# Altium PCB UL-SWAP-DAQ-3-MODULE.PcbDoc
Units mil, origin at the board's own origin, x right, y up, seen from the top; angles counter-clockwise.
Board outline 850 x 1690 mil, 2 copper layers (Top Layer, Bottom Layer); 49 components, 36 nets, 159 pads, 48 vias.
Unrouted connection lines stored in the file: 10.
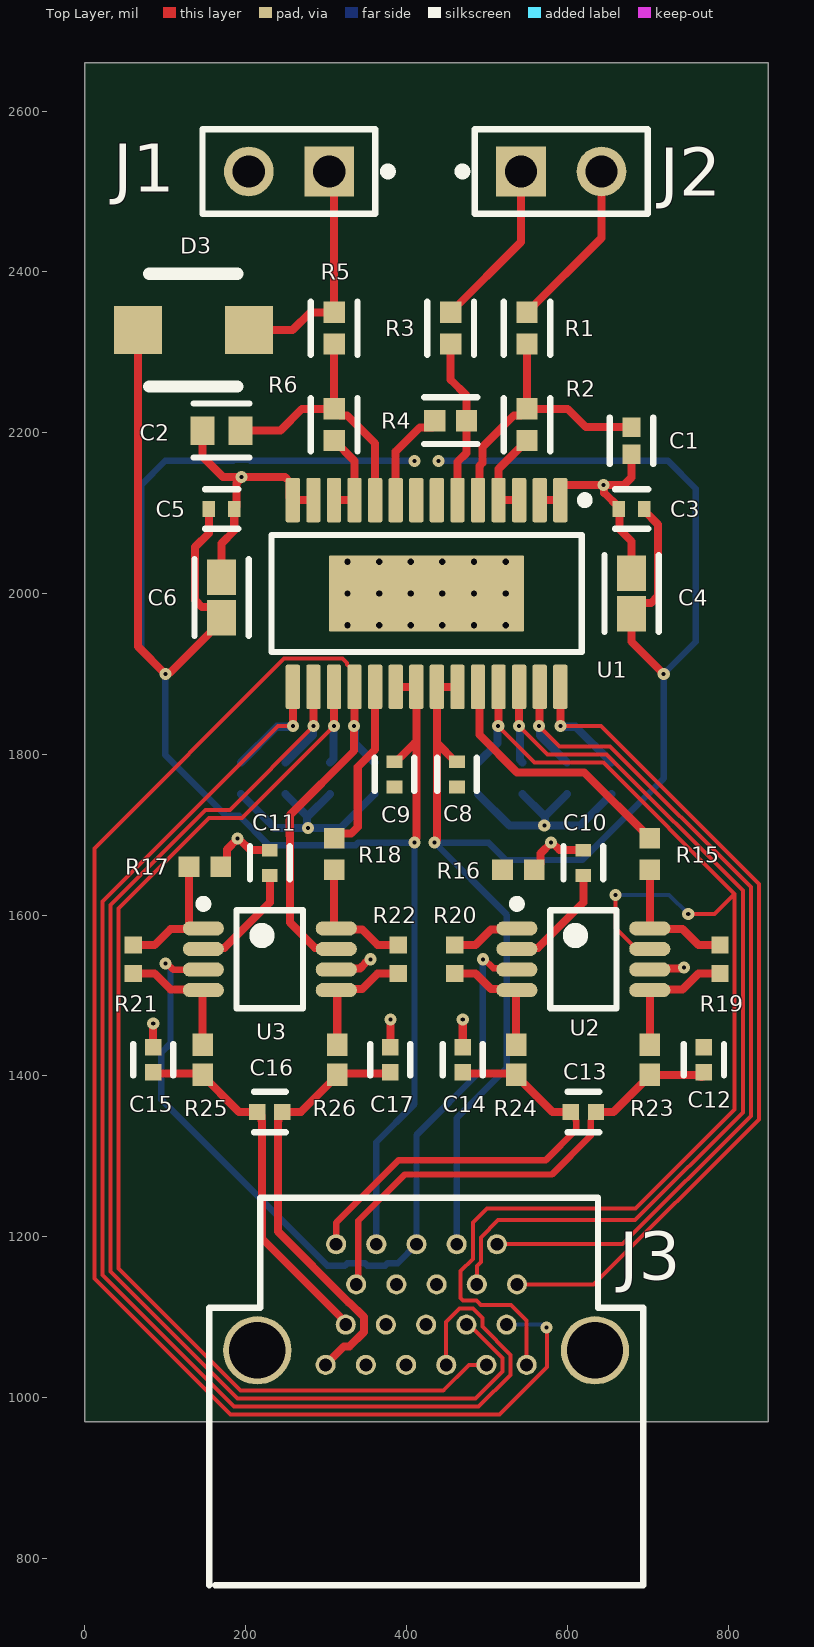
[diagram p0: Top Layer view]
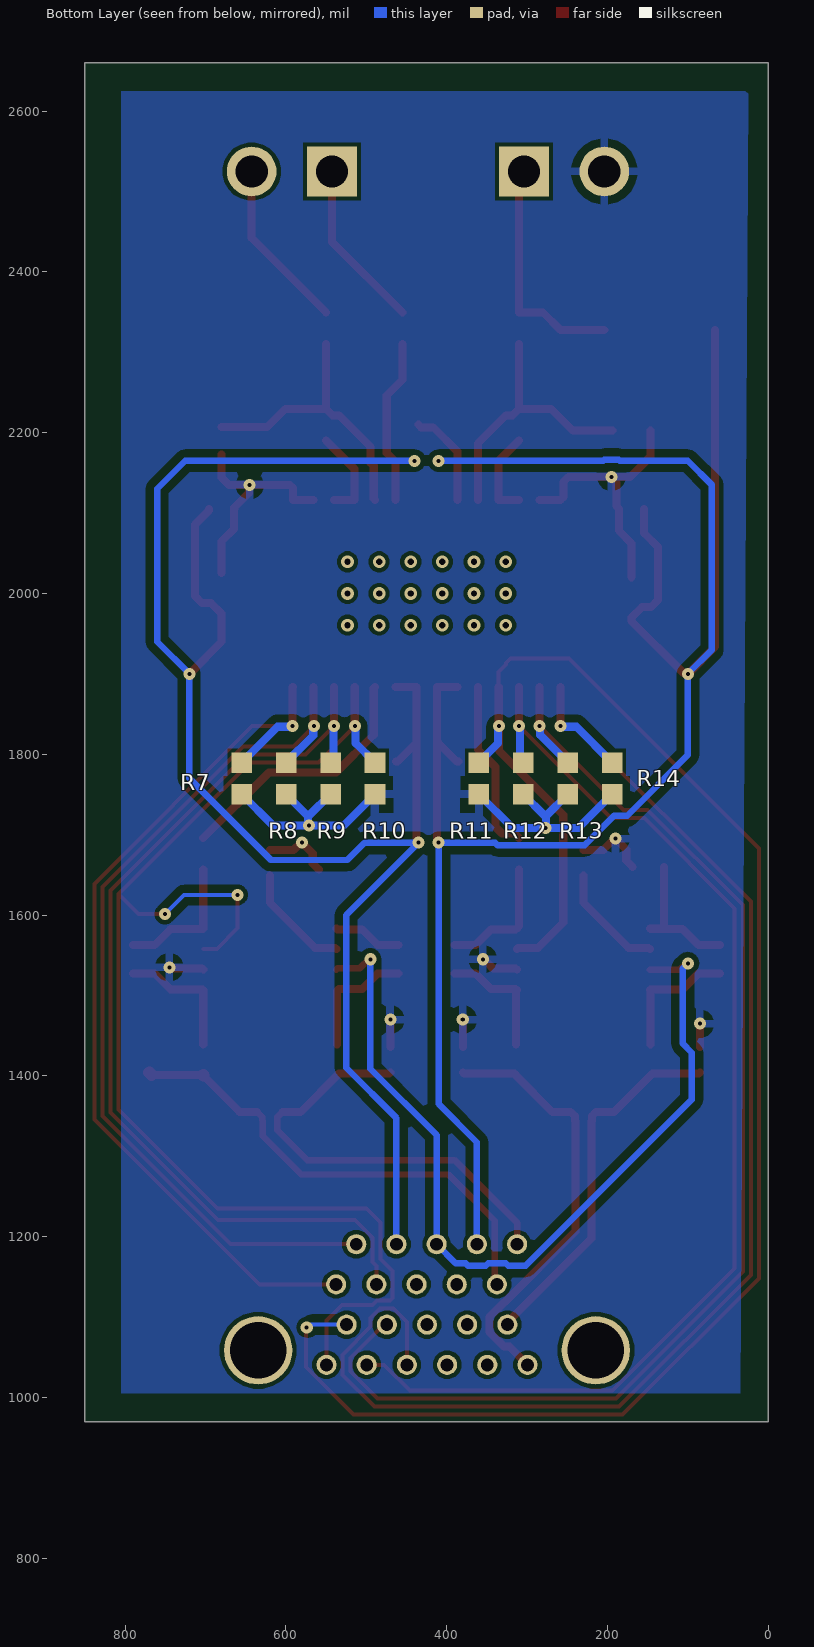
[diagram p1: Bottom Layer view, seen from below]
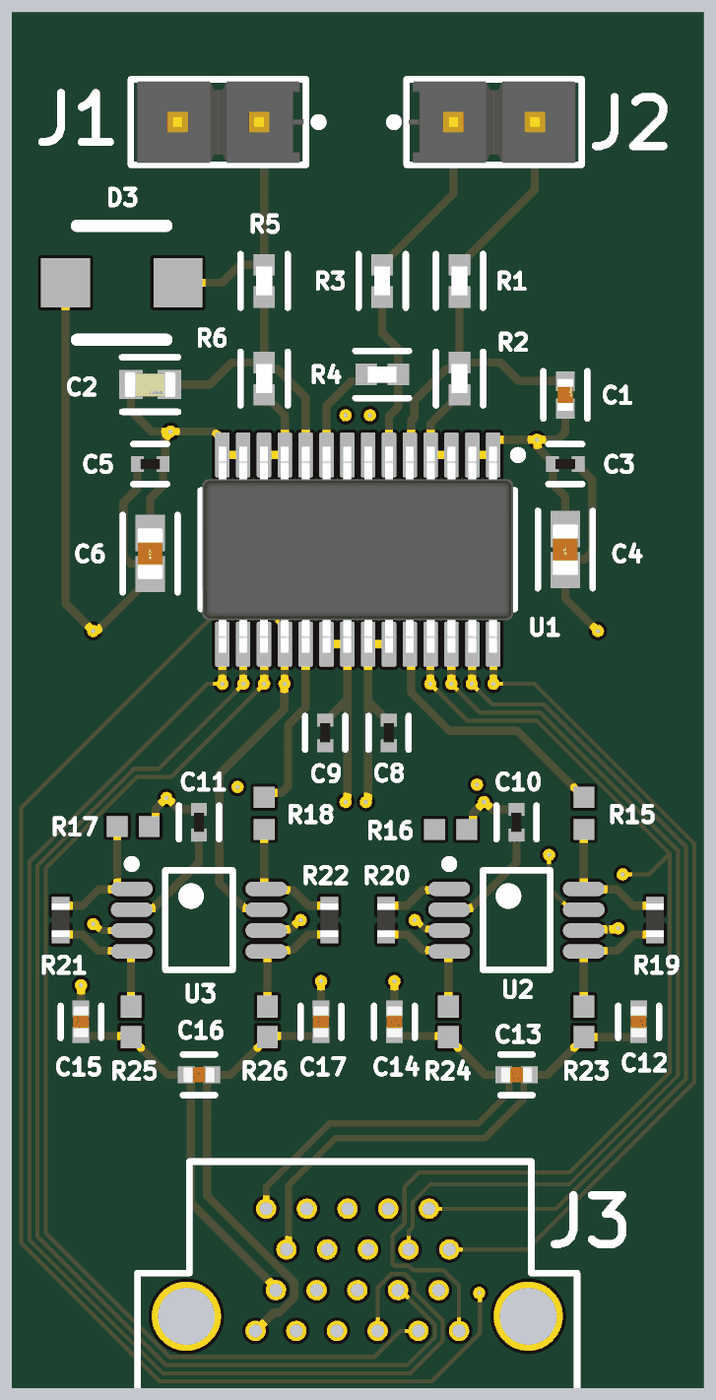
[diagram p2: 3D render of the assembled board from above, using the file's embedded part models]
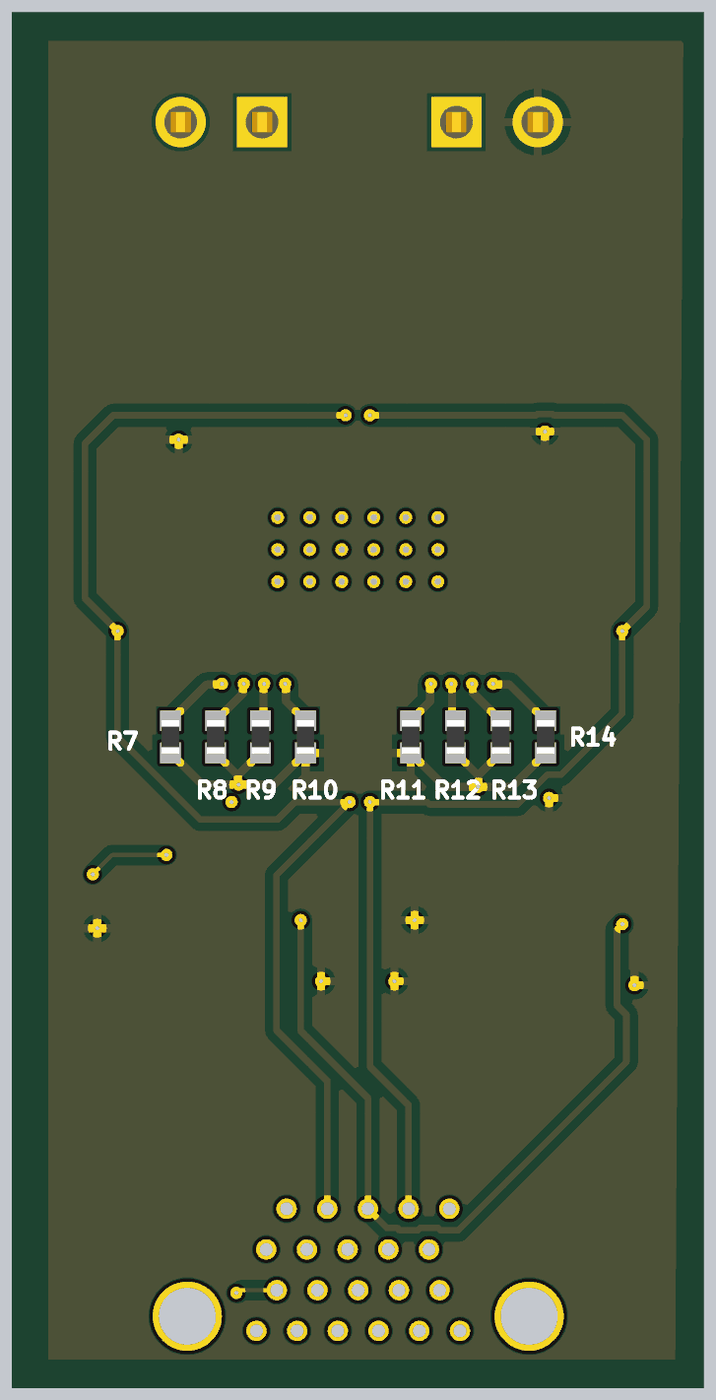
[diagram p3: 3D render of the assembled board from below, using the file's embedded part models]

## Layer stack, top to bottom
Top Solder: solder mask 0.4, Solder Resist, Dk 3.5
Top Layer: signal copper 1.4
Dielectric 1: dielectric 12.6, FR-4, Dk 4.8
Bottom Layer: signal copper 1.4
Bottom Solder: solder mask 0.4, Solder Resist, Dk 3.5

## Board outline
0,970 850,970 850,2660 0,2660

## Design rules (kind name [scope] priority, off if disabled: settings)
Clearance [All] p1: gap=5 ignorepadtopadclearanceinfootprint=FALSE except(0: Arc-Hole Track-Hole SMDPad-Hole THPad-Hole Via-Hole Fill-Hole Poly-Hole Region-Hole Text-Hole; 10: Arc-Fill Arc-Poly Arc-Region Arc-Text Track-Fill Track-Poly Track-Region Track-Text Fill-Fill Fill-Poly Fill-Region Fill-Text Poly-Poly Poly-Region Poly-Text Region-Region Region-Text Text-Text)
DiffPairsRouting [All] p1: maxlimit=10 minlimit=5 mostfreqgap=10 toplayer_minwidth=5 toplayer_maxwidth=15 toplayer_prefwidth=15 bottomlayer_minwidth=5 bottomlayer_maxwidth=15 bottomlayer_prefwidth=15 maxuncoupledlength=500
PolygonConnect [All] p1: connectstyle=Relief reliefconductorwidth=10 reliefentries=4 polygonreliefangle="90 Angle" airgapwidth=10
RoutingVias [All] p1: holewidth=28 width=50 viastyle="Through Hole" minholewidth=28 minwidth=50 maxholewidth=28 maxwidth=50
SolderMaskExpansion [All] p1: expansion=4 istentingtop=FALSE
Width [All] p1: maxlimit=10 minlimit=5 preferedwidth=10 minimp=50.000000 maximp=50.000000 favimp=50.000000
29 further rules are at their usual default settings.

## Classes and differential pairs
component class CONNECTED-MODULE: J3
component class U_THS7002CPWP_Schematic: C1 C2 C3 C4 C5 C6 C8 C9 D3 R1 R2 R3 R4 R5 R6 R7 R8 R9 R10 R11 R12 R13 R14 U1
component class U_LTC6362_Schematic: C10 C11 C12 C13 C14 C15 C16 C17 R15 R16 R17 R18 R19 R20 R21 R22 R24 R25 R26 U2 U3
differential pair ADC_CH2_CH3: +ADC_CH2_CH3_P -ADC_CH2_CH3_N
differential pair ADC_CH0_CH1: +ADC_CH0_CH1_P -ADC_CH0_CH1_N

## Components (designator, comment, footprint, x,y, rotation, side; value= is the part's Value field where it differs from the comment)
C1 "GRM1557U1A302JA01D" FP-GRM155-0_05-IPC_B 680,2190 r90 top
C2 "C0603C622J5GACTU" FP-C0603C-CF-MFG 170,2202.67 r180 top value="6,200 pF"
C3 "GRM155R71C104KA88D" FP-GRM15-MFG 680,2105 r180 top value=0.10μF
C4 "C1608X5R1A685K080AC" FP-C1608-080-0_1-IPC_B 680,2000 r90 top
C5 "GRM155R71C104KA88D" FP-GRM15-MFG 170,2105 r0 top value=0.10μF
C6 "C1608X5R1A685K080AC" FP-C1608-080-0_1-IPC_B 170,1995 r90 top
C8 "GRM155R71C104KA88D" FP-GRM15-MFG 462.98,1775 r270 top value=0.10μF
C9 "GRM155R71C104KA88D" FP-GRM15-MFG 385,1775 r270 top value=0.10μF
C10 "GRM155R71C104KA88D" FP-GRM15-MFG 620,1665 r90 top value=0.10μF
C11 "GRM155R71C104KA88D" FP-GRM15-MFG 230,1665 r90 top value=0.10μF
C12 "C0402C392K3RACTU" FP-C0402-BB-MFG 770,1420 r90 top value="3,900 pF"
C13 "C0402C392K3RACTU" FP-C0402-BB-MFG 620,1355 r0 top value="3,900 pF"
C14 "C0402C392K3RACTU" FP-C0402-BB-MFG 470,1420 r90 top value="3,900 pF"
C15 "C0402C392K3RACTU" FP-C0402-BB-MFG 84.94,1420 r90 top value="3,900 pF"
C16 "C0402C392K3RACTU" FP-C0402-BB-MFG 230,1355 r180 top value="3,900 pF"
C17 "C0402C392K3RACTU" FP-C0402-BB-MFG 379.76,1420 r90 top value="3,900 pF"
D3 "CMJ0130" CMJ2000_Footprint 135,2327.7 r270 top
J1 "Comment" FP-TSW-102-07-L-S-MFG 253.86,2525 r180 top
J2 "Comment" FP-TSW-102-07-L-S-MFG 592.56,2525 r0 top
J3 "Comment" A29400-021 214.46,1058.52 r0 top
R1 "CRCW0402499RFKED" FP-CRCW0402-e3-IPC_A 550,2330 r270 top
R2 "CRCW0402499RFKED" FP-CRCW0402-e3-IPC_A 550,2210 r270 top
R3 "CRCW0402499RFKED" FP-CRCW0402-e3-IPC_A 455,2330 r270 top
R4 "CRCW0402499RFKED" FP-CRCW0402-e3-IPC_A 455,2215 r180 top
R5 "CRCW0402499RFKED" FP-CRCW0402-e3-IPC_A 310,2330 r270 top
R6 "CRCW0402499RFKED" FP-CRCW0402-e3-IPC_A 310,2210 r270 top
R7 "ERJ-2RKF3301X" RESC1005X40X25ML05T05 655,1770 r270 bottom
R8 "ERJ-2RKF3301X" RESC1005X40X25ML05T05 599.71,1770 r270 bottom
R9 "ERJ-2RKF3301X" RESC1005X40X25ML05T05 544.43,1770 r270 bottom
R10 "ERJ-2RKF3301X" RESC1005X40X25ML05T05 489.14,1770 r270 bottom
R11 "ERJ-2RKF3301X" RESC1005X40X25ML05T05 360,1770 r270 bottom
R12 "ERJ-2RKF3301X" RESC1005X40X25ML05T05 304.71,1770 r270 bottom
R13 "ERJ-2RKF3301X" RESC1005X40X25ML05T05 249.43,1770 r270 bottom
R14 "ERJ-2RKF3301X" RESC1005X40X25ML05T05 194.14,1770 r270 bottom
R15 "ERJ-2RKF1241X" RESC1005X40X25ML05T05 702.8,1676.07 r270 top
R16 "ERJ-2RKF1241X" RESC1005X40X25ML05T05 539.12,1656.39 r180 top
R17 "ERJ-2RKF1241X" RESC1005X40X25ML05T05 149.12,1660 r180 top
R18 "ERJ-2RKF1241X" RESC1005X40X25ML05T05 310,1676.07 r270 top
R19 "ERJ-2RKF1001X" RESC1005X40X25NL05T05 790,1545 r270 top
R20 "ERJ-2RKF1001X" RESC1005X40X25NL05T05 460,1545 r270 top
R21 "ERJ-2RKF1001X" RESC1005X40X25NL05T05 60,1545 r270 top
R22 "ERJ-2RKF1001X" RESC1005X40X25NL05T05 390,1545 r270 top
R23 "RC0402FR-0735R7L" RESC1005X40X25ML05T10 702.8,1420 r270 top (schematic designator R24)
R24 "RC0402FR-0735R7L" RESC1005X40X25ML05T10 536.29,1420 r270 top
R25 "RC0402FR-0735R7L" RESC1005X40X25ML05T10 146.53,1420 r270 top
R26 "RC0402FR-0735R7L" RESC1005X40X25ML05T10 313.91,1420 r270 top
U1 "THS7002PWP" PWP0028E_N 425,2000 r270 top
U2 "Comment" LT-MS8-8_L 620,1545 r0 top
U3 "Comment" LT-MS8-8_L 230,1545 r0 top

## Footprints (in the part's own frame and the unit in brackets; to place one, negate y for a bottom-side part, rotate by r counter-clockwise, add the part's x,y. Pads: shape width x height; smd on the part's side, far side on the other; paste and mask are expansions set on the pad)
A29400-021 [mil] "NANO-D 21 SKT FEMALE R/A PCB"
  round 25 hole 16: 1(85,-18) 2(110,32) 3(135,-18) 4(160,32) 5(185,-18) 6(210,32) 7(235,-18) 8(260,32) 9(285,-18) 10(310,32) 11(335,-18) 12(98,132) 13(123,82) 14(148,132) 15(173,82) 16(198,132) 17(223,82) 18(248,132) 19(273,82) 20(298,132) 21(323,82)
  round 85 hole 15: ""(0,0)
  round 85 hole 70: ""(0,0) ""(420,0)
  silkscreen extent -60,-292 480,190
CMJ2000_Footprint [mil] "Constant Current Regulator"
  rect 60x60 smd: 1(0,69) 2(0,-69)
  silkscreen extent -70,-55 70,55
FP-C0402-BB-MFG [mm]
  rect 0.52x0.52 smd paste+0 mask+0: 1(-0.4,0) 2(0.4,0)
  silkscreen extent -0.5,-0.64 0.5,0.64, body extent -0.8,-0.4 0.8,0.4, height 0.25
FP-C0603C-CF-MFG [mm]
  rect 0.75x0.9 smd paste+0 mask+0: 1(-0.6,0) 2(0.6,0)
  silkscreen extent -0.87,-0.85 0.88,0.85, body extent -1.2,-0.6 1.2,0.6, height 0.25
FP-C1608-080-0_1-IPC_B [mil]
  rect 44.53x35.91 smd paste+0 mask+0: 1(-25.22,0) 2(25.22,0)
  silkscreen extent -47,-34 47,34, body extent -57,-28 57,28, height 10
FP-CRCW0402-e3-IPC_A [mil]
  rect 26.31x26.48 smd paste+0 mask+0: 1(-19.77,0) 2(19.77,0)
  silkscreen extent -33,-29 33,29, body extent -41,-21 41,21, height 10
FP-GRM15-MFG [mm]
  rect 0.4x0.5 smd paste+0 mask+0: 1(-0.4,0) 2(0.4,0)
  silkscreen extent -0.53,-0.63 0.53,0.63, body extent -0.7,-0.38 0.7,0.38, height 0.25
FP-GRM155-0_05-IPC_B [mil]
  rect 24.23x22.54 smd paste+0 mask+0: 1(-16.87,0) 2(16.87,0)
  silkscreen extent -29,-27 29,27, body extent -35,-17 35,17, height 10
FP-TSW-102-07-L-S-MFG [mm]
  rect 1.57x1.57 hole 1.02 paste-1000 mask+0: 1(-1.27,0)
  round 1.57 hole 1.02 paste-1000 mask+0: 2(1.27,0)
  silkscreen extent -3.25,-1.34 2.73,1.34, body extent -2.83,-1.44 2.83,1.44, height 0.25
LT-MS8-8_L [mm] "SOP, 8-Leads, Body 3x3mm, Pitch 0.65mm, IPC High Density"
  oval 1.3x0.45 smd: 1(-2.1,0.975) 2(-2.1,0.325) 3(-2.1,-0.325) 4(-2.1,-0.975) 5(2.1,-0.975) 6(2.1,-0.325) 7(2.1,0.325) 8(2.1,0.975)
  silkscreen extent -2.22,-1.55 1.05,1.87, body extent -1.55,-1.55 1.55,1.55, height 1.1
PWP0028E_N [mm] "SOP, 28-leads, Body 4.5x9.8mm, Pitch 0.65mm, Thermal Pad 2.4x6.17mm, IPC Medium Density"
  rrect22% 1.4x0.45 smd: 1(-2.95,4.225) 2(-2.95,3.575) 3(-2.95,2.925) 4(-2.95,2.275) 5(-2.95,1.625) 6(-2.95,0.975) 7(-2.95,0.325) 8(-2.95,-0.325) 9(-2.95,-0.975) 10(-2.95,-1.625) 11(-2.95,-2.275) 12(-2.95,-2.925) 13(-2.95,-3.575) 14(-2.95,-4.225) 15(2.95,-4.225) 16(2.95,-3.575) 17(2.95,-2.925) 18(2.95,-2.275) 19(2.95,-1.625) 20(2.95,-0.975) 21(2.95,-0.325) 22(2.95,0.325) 23(2.95,0.975) 24(2.95,1.625) 25(2.95,2.275) 26(2.95,2.925) 27(2.95,3.575) 28(2.95,4.225)
  rrect4% 2.4x6.17 smd: 29(0,0)
  silkscreen extent -3.07,-4.9 1.85,5.13, body extent -3.21,-4.85 3.21,4.85, height 0.98
RESC1005X40X25ML05T05 [mm] "Chip Resistor, 2-Leads, Body 1.05x0.55mm, IPC Low Density"
  rect 0.65x0.65 smd: 1(-0.5,0) 2(0.5,0)
  body extent -0.53,-0.28 0.53,0.28, height 0.4
RESC1005X40X25ML05T10 [mm] "Chip Resistor, 2-Leads, Body 1.00x0.50mm, IPC Low Density"
  rect 0.7x0.65 smd: 1(-0.475,0) 2(0.475,0)
  body extent -0.53,-0.27 0.53,0.28, height 0.4
RESC1005X40X25NL05T05 [mm] "Chip Resistor, 2-Leads, Body 1.05x0.55mm, IPC Medium Density"
  rect 0.55x0.55 smd: 1(-0.45,0) 2(0.45,0)
  body extent -0.53,-0.28 0.53,0.28, height 0.4

## Part data
C1: library part CMP-2008-04488-2, "Chip Multilayer Ceramic Capacitors for General Purpose, 0402, 3000pF, U2J, -750ppm/°C, 5%, 10V", Capacitance=3nF, Case Code (Imperial)=0402, Case Code (Metric)=1005, Dielectric=U2J, Max Operating Temperature=125°C, Min Operating Temperature=-55°C, Package Quantity=10000, Tolerance=5%, Voltage Rating=10V, Case/Package=0402, Depth=0.5mm, Height=0.5mm, Lead Free="Lead Free", Length=1mm, Mount="Surface Mount", Packaging="Tape and Reel", Radiation Hardening=No, Termination=SMD/SMT, Thickness=0.022inch, Voltage Rating (DC)=10V, Width=0.5mm
C2: library part CMP-1035-02247-3, "Multilayer Ceramic Capacitor, C Series, 6200 Pf, - 5%, C0g / Np0, 50 V, 0603 [1608 Metric] Rohs Compliant: Yes", Capacitance="6,200 pF", Manufacturer=KEMET, Package=C0603C-CF, Temperature="-55°C to +125°C", Temperature Characteristic=C0G, Temperature Coefficient=30ppm/°C, Temperature Range High=+125°C, Temperature Range Low=-55°C, Tolerance=0.05, Voltage Rating="50 V", Automotive=Yes, Automotive Grade="Grade 1", Category=Cap, ComponentLink2Description=Datasheet, ComponentLink2URL=https://api.kemet.com/component-edge/download/datasheet/C0603C100J5GACAUTO.pdf, Device Class L1="Passive Components", Device Class L2=Capacitors, Device Class L3="Ceramic Capacitors", Digikey Description="Multilayer Ceramic Capacitor, C Series, 6200 Pf, - 5%, C0g / Np0, 50 V, 0603 [1608 Metric] Rohs Compliant: Yes", Height=0.87mm, Lead Free=Yes, Manufacturer Part Number=C0603C622J5GACTU, Material=Ceramic, Mouser Description="Multilayer Ceramic Capacitors MLCC - SMD/SMT 50volts 6200pF 5% C0G", Octopart=https://octopart.com/c0603c622j5gactu-kemet-19757383, RoHS=TRUE
C3 C5 C8 C9 C10 C11: library part CMP-2100-03641-2, "CAP CER 0.1UF 16V X7R 0402", Capacitance=0.10μF, Manufacturer=Murata, Package=GRM15, Temperature="-55°C to +125°C", Temperature Characteristic=X7R, Temperature Range High=+125°C, Temperature Range Low=-55°C, Tolerance=10%, Voltage Rating=16Vdc, Category=Cap, ComponentLink2Description=Datasheet, ComponentLink2URL=https://search.murata.co.jp/Ceramy/image/img/A01X/G101/ENG/GRM155R71H471KA01-01A.pdf, Device Class L1="Passive Components", Device Class L2=Capacitors, Device Class L3="Ceramic Capacitors", Digikey Description="CAP CER 0.1UF 16V X7R 0402", Height=0.55mm, Ipc Land Pattern Name=CAPC10050X219, Lead Free=yes, Manufacturer Part Number=GRM155R71C104KA88D, Material=Ceramic, Mouser Description="0402 0.1 uF 16V ±10 % Tolerance X7R SMT Multilayer Ceramic Capacitor", Octopart=https://octopart.com/grm155r71c104ka88d-murata-196880, RoHS=TRUE, Standoff Height=0mm
C4 C6: library part CMP-08246-004364-1, "Multilayer Ceramic Capacitors 6.8μF ±10% 10V X5R SMD 0603", Capacitance=6.8uF, Case Code (Imperial)=0603, Case Code (Metric)=1608, Dielectric=X5R, Dielectric Material=Ceramic, Max Operating Temperature=85°C, Min Operating Temperature=-55°C, Package Quantity=1, Tolerance=10%, Voltage Rating=10V, Case/Package=0603, Construction=Flat, Depth=0.8mm, Height=0.8mm, Lead Free="Lead Free", Length=1.6mm, Mount="Surface Mount", Packaging="Tape and Reel", REACH SVHC="No SVHC", RoHS Compliant=Yes, Series=C, Termination=SMD/SMT, Thickness=0.035inch, Voltage Rating (DC)=10V, Weight=7.1E-05oz, Width=0.031inch
C12 C13 C14 C15 C16 C17: library part CMP-2008-03191-2, "CAP CER 3900PF 25V X7R 0402", Capacitance="3,900 pF", Manufacturer=Kemet, Package=C0402-BB, Temperature="-55°C to +125°C", Temperature Characteristic=X7R, Temperature Coefficient=15%, Temperature Range High=+125°C, Temperature Range Low=-55°C, Tolerance=0.1, Voltage Rating="25 V", Automotive=No, Category=Cap, ComponentLink2Description=Datasheet, ComponentLink2URL=https://content.kemet.com/datasheets/KEM_C1002_X7R_SMD.pdf, Device Class L1="Passive Components", Device Class L2=Capacitors, Device Class L3="Ceramic Capacitors", Digikey Description="CAP CER 3900PF 25V X7R 0402", Height=0.55mm, Ipc Land Pattern Name=CAPC10050X50, Lead Free=Yes, Manufacturer Part Number=C0402C392K3RACTU, Material=Ceramic, Mouser Description="Capacitor; Ceramic; Cap 3900pF; Tol 10%; SMT; Vol-Rtg 50V; X7R", Octopart=https://octopart.com/c0402c392k3ractu-kemet-141288, RoHS=TRUE
D3: library part CMJ2000/0130, "CMJ2000: DIODE CUR REG 100V 2.32MA 500MW; CMJ0130 DIODE CUR REG 100V 0.5mA 500MW", ComponentLink1Description="New link"
R1 R2 R3 R4 R5 R6: library part CMP-2002-00037-2, "RES Thick Film, 499Ω, 1%, 0.063W, 100ppm/°C, 0402", Case Code (Imperial)=0402, Case Code (Metric)=1005, Max Operating Temperature=155°C, Max Power Dissipation=63mW, Min Operating Temperature=-55°C, Package Quantity=10, Resistance=499R, Temperature Coefficient=100ppm/°C, Tolerance=1%, Voltage Rating=50V, Case/Package=0402, Composition="Thick Film", Contact Plating=Tin, Depth=0.5mm, Features="Automotive AEC-Q200", Height=0.35mm, Lead Free="Lead Free", Length=1mm, Military Standard=Not, Mount="Surface Mount", Number of Terminations=2, Packaging="Tape and Reel", Power Rating=63mW, Radiation Hardening=No, Termination=SMD/SMT, Voltage Rating (DC)=50V, Weight=2.3E-05oz, Width=0.02inch, Working Voltage=50V
R7 R8 R9 R10 R11 R12 R13 R14: library part CMP-1011-00567-3, "Chip Resistor, 3.3 KOhm, +/- 1%, 0.1 W, -55 to 155 degC, 0402 (1005 Metric), RoHS, Tape and Reel", Case Code (Imperial)=0402, Case Code (Metric)=1005, Manufacturer=Panasonic, Max Operating Temperature=155degC, Max Power Dissipation=100mW, Min Operating Temperature=-55degC, Package Description="2-Pin Surface Mount Device, Body 1 x 0.5 mm", Package Quantity=1, Resistance=3.3KOhm, Temperature Coefficient=100ppm/degreesC, Tolerance=1%, Voltage Rating=50V, Case/Package=0402, Composition=ThickFilm, Contact Plating=Tin, Datasheet URL=https://industrial.panasonic.com/cdbs/www-data/pdf/RDA0000/AOA0000C283.pdf, Datasheet Version=42095.0, Depth=0.5mm, Height=0.35mm, Lead Free=LeadFree, Length=1mm, Manufacturer URL=http://www.panasonic.com/, Military Standard=Not, Mount=SurfaceMount, Number of Pins=2, Number of Terminations=2, Package Reference=0402, Packaging=TapeandReel, Power Rating=100mW, Radiation Hardening=No, REACH SVHC=NoSVHC, RoHSCompliant=true, Termination=SMD/SMT, Voltage Rating (DC)=50V, Width=0.02inch
R15 R16 R17 R18: library part CMP-2002-00652-1, Manufacturer=Panasonic, Part Number=ERJ-2RKF1241X
R19 R20 R21 R22: library part CMP-1011-00510-4, "Chip Resistor, 1 KOhm, +/- 1%, 100 mW, -55 to 155 degC, 0402 (1005 Metric), RoHS, Tape and Reel", Case Code (Imperial)=0402, Case Code (Metric)=1005, Manufacturer="Basic Passives", Max Operating Temperature="155 degC", Min Operating Temperature="-55 degC", Package Quantity=10000, Power Rating="100 mW", Resistance="1 KOhm", Tolerance=1%, Voltage Rating="50 V", Case\/Package=0402, ComponentLink1Description="Manufacturer URL", ComponentLink1URL=http://www.panasonic.com/, ComponentLink2Description=Datasheet, ComponentLink2URL=http://industrial.panasonic.com/cdbs/www-data/pdf/RDA0000/AOA0000C86.pdf, DatasheetVersion=04/2015, Height="0.35 mm", Length="1 mm", Mount="Surface Mount", Mounting Technology="Surface Mount", PackageDescription="2-Pin Surface Mount Device, Body 1 x 0.5 mm", PackageReference=0402, Packaging="Tape and Reel", PartNumber=ERJ-2RKF1001X, Pins=2, Radiation Hardening=No, REACH SVHC=Yes, RoHSCompliant=true, Width="0.5 mm"
R23 R24 R25 R26: library part CMP-2002-07630-1, Manufacturer=Yageo, Part Number=RC0402FR-0735R7L
U1: library part Component_1
U2 U3: library part CMP-0359-00920-2, "Single Channel, Precision, Low Power Differential Operational Amplifier / SAR ADC Driver, RRIO, 180 MHz Typical GBW, 45 V/us Typical SR, 2.8 to 5.25 V, 8-Pin SOP (MS8-8), High Temperature / Automotive, Pb-Free"

## Via types
v1: diameter 15, hole 5, Top Layer to Bottom Layer, 30 vias
v2: diameter 15.75, hole 7.87, Top Layer to Bottom Layer, 18 vias

## Nets (pads, with @x,y where several pads share a name; then routed paths per layer and width w, separated by ;. In a path a pad name is that pad's centre, name@x,y a point inside that pad or via, vN(x,y) a via of type N, cw(c..) or ccw(c..) an arc to the next point about the centre after c; other vN are vias at no path point)
+5V: J3.16 U2.3 U3.3 | length 1080.3
  Top Layer w8: v1(100,1540) 101.89,1540 109.69,1532.2 U3.3 ; v1(495,1545) 496.89,1545 507.83,1534.06 535.46,1534.06 U2.3
  Bottom Layer w8: v1(100,1540) 106.5,1533.5 106.5,1440.2 95,1428.7 95,1370.51 301.49,1164.02 323.46,1164.02 326.46,1167.02 348.44,1167.02 351.44,1164.02 373.44,1164.02 376.44,1167.02 388.96,1167.02 J3.16 412.46,1326.29 495,1408.83 v1(495,1545)
+10.5V: C5.1 C6.1 C9.1 D3.2 J3.14 U1.8 U1.20 U1.21 | length 2542.6
  Top Layer w8: 410,1813.78 412.2,1815.98
  Top Layer w10: D3.2 66,1934 v1(100,1900) 100.96,1900.96 105.48,1900.96 170,1965.47 C6.1 170,1970 157.04,1982.95 145.83,1982.95 137.04,1991.74 137.04,2057.71 154.25,2074.92 C5.1 ; C9.1 386.97,1790.75 410,1813.78 ; U1.20 U1.21 412.2,1815.98 412.2,1695.74 410.96,1694.49 410.96,1690.96 v1(410,1690)
  Bottom Layer w8: J3.14 362.46,1317.49 410,1365.03 v1(410,1690) 339.74,1690 336.77,1687.02 228.38,1687.02 191.89,1723.52 175.55,1723.52 100,1799.07 v1(100,1900) 70,1930 70,2135 100,2165 184.59,2165 186.09,2166.5 203.91,2166.5 205.41,2165 v1(410,2165)
-10V: C3.1 C4.1 C8.1 J3.18 U1.7 U1.22 U1.23 | length 2114.2
  Top Layer w10: v1(435,1690) 435,1691.35 437.8,1694.15 437.8,1813.97 ; C8.1 461.01,1790.75 437.8,1813.97 ; U1.23 U1.22 437.8,1813.97 ; C3.1 695.75,2103.03 712.96,2085.82 712.96,1996.74 704.17,1987.95 692.96,1987.95 680,1975 C4.1 680,1940 v1(720,1900)
  Bottom Layer w8: v1(440,2165) 725.31,2165 760,2130.31 760,1940 v1(720,1900) 720,1769.93 618.57,1668.5 523.65,1668.5 502.15,1690 v1(435,1690) 525,1600 525,1410.02 462.46,1347.48 J3.18
A_GP0: J3.21 R7.1 U1.28 | length 1137.7
  Top Layer w5: J3.21 632.94,1140.52 838.33,1345.9 838.33,1638.85 641.98,1835.2 v1(591.79,1835.2)
  Top Layer w10: U1.28 591.56,1883.63 591.56,1835.42 v1(591.79,1835.2)
  Bottom Layer w10: v1(591.79,1835.2) 592.74,1834.24 610.45,1834.24 R7.1
A_GP1: J3.20 R8.1 U1.27 | length 1121.8
  Top Layer w5: J3.20 668.8,1190.52 828.33,1350.04 828.33,1634.71 653.14,1809.89 590.31,1809.89 v1(565,1835.2)
  Top Layer w10: v1(565,1835.2) 565.37,1835.57 565.37,1883.48 U1.27
  Bottom Layer w10: v1(565,1835.2) 565.96,1834.24 565.96,1823.44 R8.1
A_GP2: J3.19 R9.1 U1.26 | length 1186.1
  Top Layer w5: J3.19 487.46,1163.21 492.46,1168.21 492.46,1198.8 514.09,1220.43 684.57,1220.43 818.33,1354.18 818.33,1630.57 649,1799.89 575.31,1799.89 v1(540,1835.2)
  Top Layer w10: v1(540,1835.2) 540.08,1835.27 540.08,1883.78 U1.26
  Bottom Layer w10: v1(540,1835.2) 540.96,1834.24 540.96,1793.16 R9.1
ADC_CH0_CH1_N: C12.1 C13.2 J3.13 R23.2 | length 599.6
  Top Layer w8: J3.13@340,1140.52 340,1160.27 340,1219.54 397.7,1277.25 580.94,1277.25 629,1325.31 629,1344.08 629.51,1344.59 629.51,1348.76 C13.2
  Top Layer w10: C13.2 657.48,1355 R23.2@702.8,1400.31 ; R23.2 C12.1@767.05,1401.3
  Top Layer w15: R23.2@702.8,1400.31 R23.2 ; C12.1@767.05,1401.3 C12.1
ADC_CH0_CH1_P: C13.1 C14.1 J3.12 R24.2 | length 557
  Top Layer w8: J3.12 312.46,1217.46 390.25,1295.25 573.48,1295.25 611,1332.76 611,1344.08 610.49,1344.59 610.49,1348.76 C13.1
  Top Layer w10: J3.12 J3.12@315.33,1193.39 ; C14.1 471.48,1402.78 533.83,1402.78 581.61,1355 C13.1
ADC_CH2_CH3_N: C16.1 C17.1 J3.1 R26.2 | length 540.2
  Top Layer w10: J3.1 322.05,1063.1 328.87,1063.1 346.96,1081.2 346.96,1099.84 328.78,1118.02 328.14,1118.02 240,1206.16 240,1343.91 240.51,1344.42 240.51,1349.76 C16.1 268.59,1355 313.91,1400.31 R26.2 315.38,1402.78 378.29,1402.78 C17.1
ADC_CH2_CH3_P: C15.1 C16.2 J3.2 R25.2 | length 459.8
  Top Layer w10: C15.1 86.42,1402.78 144.07,1402.78 191.84,1355 C16.2 219.49,1349.76 219.49,1344.42 220,1343.91 220,1197.88 324.46,1093.41 J3.2
B_GP0: J3.7 R14.1 U1.15 | length 1711.2
  Top Layer w5: v1(258.67,1835.2) 240.15,1835.2 21.67,1616.72 21.67,1152.31 185.47,988.52 489.89,988.52 529.46,1028.09 529.46,1052.94 494.46,1087.94 494.46,1098.8 482.75,1110.52 466.18,1110.52 449.46,1093.8 J3.7
  Top Layer w10: v1(258.67,1835.2) U1.15
  Bottom Layer w10: R14.1 238.7,1834.24 257.72,1834.24 v1(258.67,1835.2)
B_GP1: J3.8 R13.1 U1.16 | length 1556.2
  Top Layer w5: v1(284.6,1835.2) 180.26,1730.86 149.96,1730.86 31.67,1612.57 31.67,1156.46 189.61,998.52 485.75,998.52 519.46,1032.23 519.46,1048.8 477.75,1090.52 J3.8
  Top Layer w10: U1.16 284.43,1883.68 284.43,1835.37 v1(284.6,1835.2)
  Bottom Layer w10: R13.1 283.64,1823.9 283.64,1834.24 v1(284.6,1835.2)
B_GP2: J3.9 R12.1 U1.17 | length 1440.5
  Top Layer w5: v1(310,1835.2) 195.66,1720.86 154.1,1720.86 41.67,1608.43 41.67,1160.6 193.75,1008.52 445.75,1008.52 477.75,1040.52 J3.9
  Top Layer w10: U1.17 309.92,1883.78 v1@309.92,1835.2
  Bottom Layer w10: R12.1 309.04,1794.01 309.04,1834.24 v1(310,1835.2)
GND: C1.1 C2.2 C3.2 C4.2 C5.2 C6.2 C8.2 C9.2 C10.2 C11.2 C12.2 C14.2 C15.2 C17.2 J1.2 R4.2 R7.2 R8.2 R9.2 R10.2 R11.2 R12.2 R13.2 R14.2 R16.1 R17.1 U1.1 U1.2 U1.9 U1.13 U1.14 U2.6 U3.6 | length 1683.9
  Top Layer w10: C15.2@84.97,1435.78 v1(85,1465) ; C2.2 146.38,2170.25 171.63,2145 v1(195,2145) ; R17.1 176.6,1667.8 176.6,1681.6 v1(190,1695) 191.35,1695 205.16,1681.2 229.55,1681.2 C11.2 ; C6.2 170,2062.38 185.75,2078.13 C5.2 185.37,2105.37 188.62,2108.62 188.62,2137.26 195,2143.65 v1(195,2145) ; U1.13 U1.14 254.8,2120 254.8,2138.9 248.7,2145 v1(195,2145) ; U3.6 314.15,1533.68 342.29,1533.68 v1@349.3,1540.7 ; C17.2 379.88,1435.87 379.88,1469.88 v1(380,1470) ; U1.9 386.61,2176.61 416.76,2206.76 431.76,2206.76 R4.2@435,2210 ; C14.2 v1(470,1470) ; R16.1 566.6,1664.18 566.6,1676.6 v1(580,1690) 581.35,1690 590.61,1680.75 C10.2 ; U1.2 U1.1 591.34,2131.14 595.2,2135 v1(645,2135) ; C4.2 680,2064.88 664.73,2080.16 664.73,2104.53 C3.2 664.25,2106.97 645.96,2125.26 645.96,2134.04 v1(645,2135) ; C1.1 680,2144.37 670.63,2135 v1(645,2135) ; U2.6 704.15,1533.68 742.33,1533.68 743.65,1535 v1(745,1535)
  Bottom Layer w10: R14.2 235.94,1708.52 v1(277.31,1708.52) ; R13.2 276.36,1723.39 276.36,1709.48 v1(277.31,1708.52) ; 278.27,1723.87 R12.2 ; R11.2 318.21,1708.52 v1(277.31,1708.52) ; R10.2 528.06,1711.4 v1(571.42,1711.4) ; R9.2 570.46,1724.28 ; R8.2 572.38,1722.98 572.38,1712.35 v1(571.42,1711.4) ; R7.2 616.08,1711.4 v1(571.42,1711.4)
  other v1: 355,1545
NetC1_2: C1.2 R1.2 R2.1 U1.5 | length 363.6
  Top Layer w10: U1.5 490.71,2117.87 490.71,2158.7 494.54,2162.53 494.54,2182.37 533.78,2221.62 541.85,2221.62 R2.1 ; R1.2 R2.1 ; C1.2 623.36,2206.87 600.46,2229.77 R2.1
NetC2_1: C2.1 R5.2 R6.1 U1.10 | length 347.6
  Top Layer w10: C2.1 243.1,2202.67 270.2,2229.77 R6.1 ; R5.2 R6.1 ; U1.10 361.02,2186.81 326.22,2221.62 318.15,2221.62 R6.1
NetC10_1: C10.1 U2.2 | length 140.3
  Top Layer w10: U2.2 538.8,1559.27 563.68,1559.27 620,1615.59 C10.1
NetC11_1: C11.1 U3.2 | length 140.3
  Top Layer w10: U3.2 148.8,1559.27 173.68,1559.27 230,1615.59 C11.1
NetR2_2: R2.2 U1.3 U1.4 | length 114.4
  Top Layer w10: U1.3 U1.4 514.57,2154.88 549.92,2190.23 R2.2
NetR3_2: R3.2 R4.1 U1.6 | length 206.8
  Top Layer w10: R3.2 455,2265.85 474.54,2246.31 474.54,2210 474.54,2174.94 463.39,2163.79 U1.6
NetR6_2: R6.2 U1.11 U1.12 | length 110.3
  Top Layer w10: U1.12 U1.11 335.43,2164.88 310.08,2190.23 R6.2
NetR15_2: R15.2 R19.1 U2.8 | length 168.9
  Top Layer w10: R15.2 702.8,1583.5 U2.8 703.44,1582.62 743.27,1582.62 763.17,1562.72 R19.1
NetR16_2: R16.2 R20.1 U2.1 | length 85.9
  Top Layer w10: R20.1 485.83,1562.72 505.02,1581.91 535.85,1581.91 U2.1
NetR17_2: R17.2 R21.1 U3.1 | length 188.3
  Top Layer w10: R21.1 86.83,1562.72 106.73,1582.62 146.56,1582.62 U3.1 133,1583.39 129.44,1586.95 R17.2
NetR18_2: R18.2 R22.1 U3.8 | length 160
  Top Layer w10: R18.2 310,1586.06 U3.8 314.15,1581.91 344.98,1581.91 364.17,1562.72 R22.1
NetR19_2: R19.2 R23.1 U2.5 | length 163.7
  Top Layer w10: R23.1 702.8,1506.73 703.44,1507.38 743.27,1507.38 763.17,1527.28 R19.2
NetR20_2: R20.2 R24.1 U2.4 | length 152.2
  Top Layer w10: R20.2 485.83,1527.28 505.02,1508.09 533.78,1508.09 536.29,1505.58 R24.1
NetR21_2: R21.2 R25.1 U3.4 | length 164.1
  Top Layer w10: R21.2 86.83,1527.28 106.73,1507.38 146.56,1507.38 U3.4 146.53,1505.82 R25.1
NetR22_2: R22.2 R26.1 U3.5 | length 154.3
  Top Layer w10: R26.1 313.91,1505.39 U3.5 314.15,1508.09 344.98,1508.09 364.17,1527.28 R22.2
PGA_A_Out: R15.1 U1.24 | length 325.6
  Top Layer w10: U1.24 490.71,1882.13 490.71,1824.29 537.61,1777.39 621.16,1777.39 R15.1
PGA_B_Out: R18.1 U1.19 | length 218.5
  Top Layer w10: R18.1 315.52,1701.28 331.28,1701.28 339.41,1709.41 339.41,1784.09 361.02,1805.7 U1.19
Sensor_A_N: J2.2 R1.1 | length 213.6
  Top Layer w10: R1.1 550.08,2349.77 642.56,2442.24 J2.2
Sensor_A_P: J2.1 R3.1 | length 211.5
  Top Layer w10: R3.1 455.08,2349.77 542.56,2437.24 J2.1
Sensor_B: D3.1 J1.1 R5.1 | length 292.9
  Top Layer w10: D3.1 258.42,2327.7 280.49,2349.77 R5.1 310,2518.86 J1.1
SHDN-A: J3.11 R10.1 U1.25 U2.7 | length 1649.8
  Top Layer w5: v1(514.13,1835.2) 559.44,1789.89 644.86,1789.89 808.33,1626.42 ; J3.11 549.46,1095.54 530,1115 492.41,1115 486.89,1120.52 470.39,1120.52 467.46,1123.45 467.46,1157.35 482.46,1172.35 482.46,1217.46 500,1235 685,1235 808.33,1358.33 808.33,1626.42 ; v1(660,1625) 660,1583.74 685.94,1557.8 U2.7 ; v1(750.52,1601.17) 783.07,1601.17 808.33,1626.42
  Top Layer w10: v1(514.13,1835.2) 514.35,1835.41 514.35,1883.64 U1.25
  Bottom Layer w5: v1(660,1625) 726.7,1625 v1(750.52,1601.17)
  Bottom Layer w10: R10.1 513.18,1813.72 513.18,1834.24 v1(514.13,1835.2)
SHDN-B: J3.10 R11.1 U1.18 U3.7 | length 2197.6
  Top Layer w5: U1.18 335.43,1902.56 326.2,1911.79 326.2,1913.38 320.67,1918.92 247.84,1918.92 11.67,1682.75 11.67,1148.17 181.33,978.52 515.75,978.52 575,1037.77 v1@575,1086.6 ; J3.10 J3.10@527.75,1090.52
  Top Layer w10: U3.7 311.2,1559.27 286.32,1559.27 255,1590.59 255,1699.01 254.81,1699.2 254.81,1717.84 255,1718.03 255,1724.45 335,1804.45 v1(335,1835.2) ; v1@335.22,1835.22 335.22,1883.64 U1.18
  Bottom Layer w5: J3.10 568.03,1090.52 571.36,1087.18 v1(574.07,1087.18)
  Bottom Layer w10: v1(335,1835.2) 335.96,1834.24 335.96,1813.73 R11.1
pads on no net: J3. J3.3 J3.4 J3.5 J3.6 J3.15 J3.17 U1.29
copper on no net:
  other v2: 326.57,1960.63 365.94,1960.63 405.31,1960.63 444.69,1960.63 484.06,1960.63 523.43,1960.63 326.57,2000 365.94,2000 405.31,2000 444.69,2000 484.06,2000 523.43,2000 326.57,2039.37 365.94,2039.37 405.31,2039.37 444.69,2039.37 484.06,2039.37 523.43,2039.37

## Polygon pours and split planes (outlines as drawn)
GND on Bottom Layer "GND_L02_P000" (solid, pour order 0): 25,2625 805,2625 805,1005 34.88,1005